# EAGLE board LilyPad_White_5pcs_v02 (EAGLE 7.5.0)
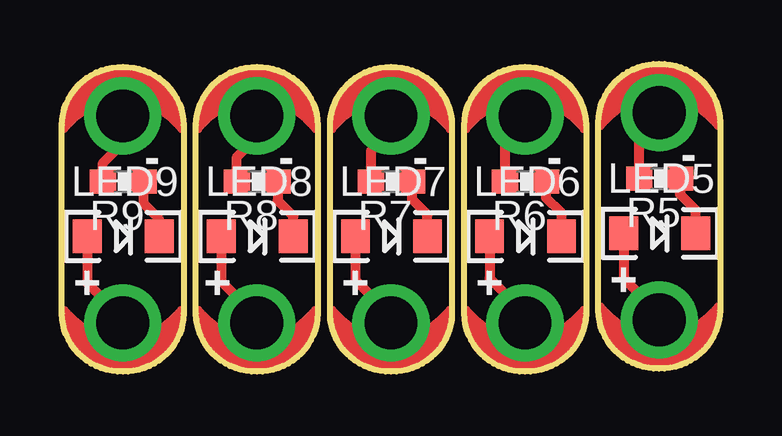
[diagram p0: board, top side]
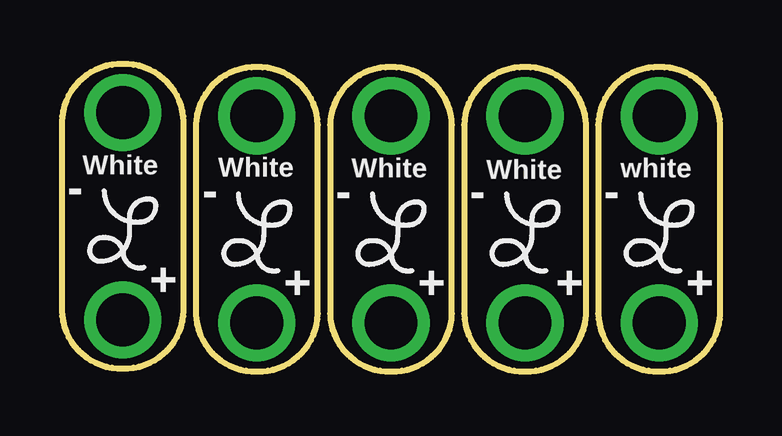
[diagram p1: board, bottom side, seen from below]

Size 27.43 x 12.83 mm. Coordinates in mm from the lower left corner, seen from the top.
Outline: 24.89,0.13 arc-90 22.35,2.54 22.35,10.41 arc-90 24.89,12.83 arc-90 27.43,10.41 27.43,2.54 arc-90 24.89,0.13
Outline: 19.3,0 arc-90 16.76,2.41 16.76,10.29 arc-90 19.3,12.7 arc-90 21.84,10.29 21.84,2.41 arc-90 19.3,0
Outline: 13.72,0 arc-90 11.18,2.41 11.18,10.29 arc-90 13.72,12.7 arc-90 16.26,10.29 16.26,2.41 arc-90 13.72,0
Outline: 8.13,0 arc-90 5.59,2.41 5.59,10.29 arc-90 8.13,12.7 arc-90 10.67,10.29 10.67,2.41 arc-90 8.13,0
Outline: 2.54,0 arc-90 0,2.41 0,10.29 arc-90 2.54,12.7 arc-90 5.08,10.29 5.08,2.41 arc-90 2.54,0
Copper layers (1*16): Top 0.035mm / dielectric 1.5mm / Bottom 0.035mm
Design rules "SparkFun-2-layer-TIGHT": minimum track width 7mil, minimum drill 15mil, track to track 7mil, track to pad 7mil, pad to pad 7mil, via to via 7mil, smd to smd 7mil, copper to edge 7mil, drill to drill 7mil, minimum pad ring 7mil, minimum via ring 7mil, stop-mask expansion 4mil, vias tented up to drill 25mil, thermal gap 10mil

## Footprints (pad centres in the part's own frame; a part is rotated, then mirrored left to right if it is on the bottom)
LED-1206 = smd 1.2 x 1.4: A -1.5,0; C 1.5,0
PETAL-SMALL = drill 2.2: 1 0,0
0603-RES = smd 1.1 x 1: 1 -0.85,0; 2 0.85,0

## Placement (x,y rotation side)
LED5  White  [LED-1206]  24.91,5.76 0 top
LED6  White  [LED-1206]  19.32,5.64 0 top
LED7  White  [LED-1206]  13.74,5.64 0 top
LED8  White  [LED-1206]  8.15,5.64 0 top
LED9  White  [LED-1206]  2.56,5.64 0 top
LED+5  SEWTAP6  [PETAL-SMALL]  24.89,2.16 0 top
LED+6  SEWTAP6  [PETAL-SMALL]  19.3,2.03 0 top
LED+7  SEWTAP6  [PETAL-SMALL]  13.72,2.03 0 top
LED+8  SEWTAP6  [PETAL-SMALL]  8.13,2.03 0 top
LED+9  SEWTAP6  [PETAL-SMALL]  2.54,2.03 0 top
LED-5  SEWTAP6  [PETAL-SMALL]  24.89,10.79 180 top
LED-6  SEWTAP6  [PETAL-SMALL]  19.3,10.67 180 top
LED-7  SEWTAP6  [PETAL-SMALL]  13.72,10.67 180 top
LED-8  SEWTAP6  [PETAL-SMALL]  8.13,10.67 180 top
LED-9  SEWTAP6  [PETAL-SMALL]  2.54,10.67 180 top
LOGO6  LOGO-LPL  [LOGO-L]  24.89,5.92 0 bottom
LOGO7  LOGO-LPL  [LOGO-L]  19.3,5.79 0 bottom
LOGO8  LOGO-LPL  [LOGO-L]  13.72,5.79 0 bottom
LOGO9  LOGO-LPL  [LOGO-L]  8.13,5.79 0 bottom
LOGO10  LOGO-LPL  [LOGO-L]  2.54,5.79 0 bottom
R5  180  [0603-RES]  24.91,8.05 180 top
R6  180  [0603-RES]  19.32,7.92 180 top
R7  180  [0603-RES]  13.74,7.92 180 top
R8  180  [0603-RES]  8.15,7.92 180 top
R9  180  [0603-RES]  2.56,7.92 180 top

## Library data of the parts
LED5-LED9 = SparkFun-LED
LED+5-LED+9 LED-5-LED-9 LOGO6-LOGO10 = LilyPad-Wearables
R5-R9 = SparkFun

## Nets
+5: LED5.A LED+5.1
+6: LED6.A LED+6.1
+7: LED7.A LED+7.1
+8: LED8.A LED+8.1
+9: LED9.A LED+9.1
-5: LED-5.1 R5.2
-6: LED-6.1 R6.2
-7: LED-7.1 R7.2
-8: LED-8.1 R8.2
-9: LED-9.1 R9.2
N$6: LED5.C R5.1
N$7: LED6.C R6.1
N$8: LED7.C R7.1
N$9: LED8.C R8.1
N$10: LED9.C R9.1

## Tracks (layer width: path | path; a pad name or v marks a point on that pad's centre or on a via)
+5
  Top 0.406: LED5.A 23.41,3.89 24.89,2.41 LED+5.1
+6
  Top 0.406: LED6.A 17.82,3.89 19.3,2.41 LED+6.1
+7
  Top 0.406: LED7.A 12.24,3.83 13.72,2.35 LED+7.1
+8
  Top 0.406: LED8.A 6.65,3.77 8.13,2.29 LED+8.1
+9
  Top 0.406: LED9.A 1.06,3.7 2.54,2.22 LED+9.1
-5
  Top 0.406: R5.2 24.06,9.71 24.89,10.54 LED-5.1
-6
  Top 0.406: R6.2 18.47,9.46 19.3,10.29 LED-6.1
-7
  Top 0.406: R7.2 12.89,9.2 13.72,10.03 LED-7.1
-8
  Top 0.406: R8.2 7.3,8.95 8.13,9.78 LED-8.1
-9
  Top 0.406: LED-9.1 2.54,9.53 1.71,8.7 R9.2
N$6
  Top 0.406: LED5.C 26.41,6.73 25.76,7.38 R5.1
N$7
  Top 0.406: R6.1 20.17,7.26 20.82,6.61 LED6.C
N$8
  Top 0.406: R7.1 14.59,7.19 15.24,6.54 LED7.C
N$9
  Top 0.406: R8.1 9,7.13 9.65,6.48 LED8.C
N$10
  Top 0.254: 3.62,6.79 3.56,6.86
  Top 0.406: LED9.C 4.06,6.35 3.62,6.79 3.41,7 R9.1

## Text on the board
tPlace: - | - | - | - | - | + | + | + | + | +
bPlace: white | White | White | White | White | - | - | - | - | - | + | + | + | + | +
bDocu: V Scoring (0.02" between parts)